# EAGLE board function_generator (EAGLE 6.1)
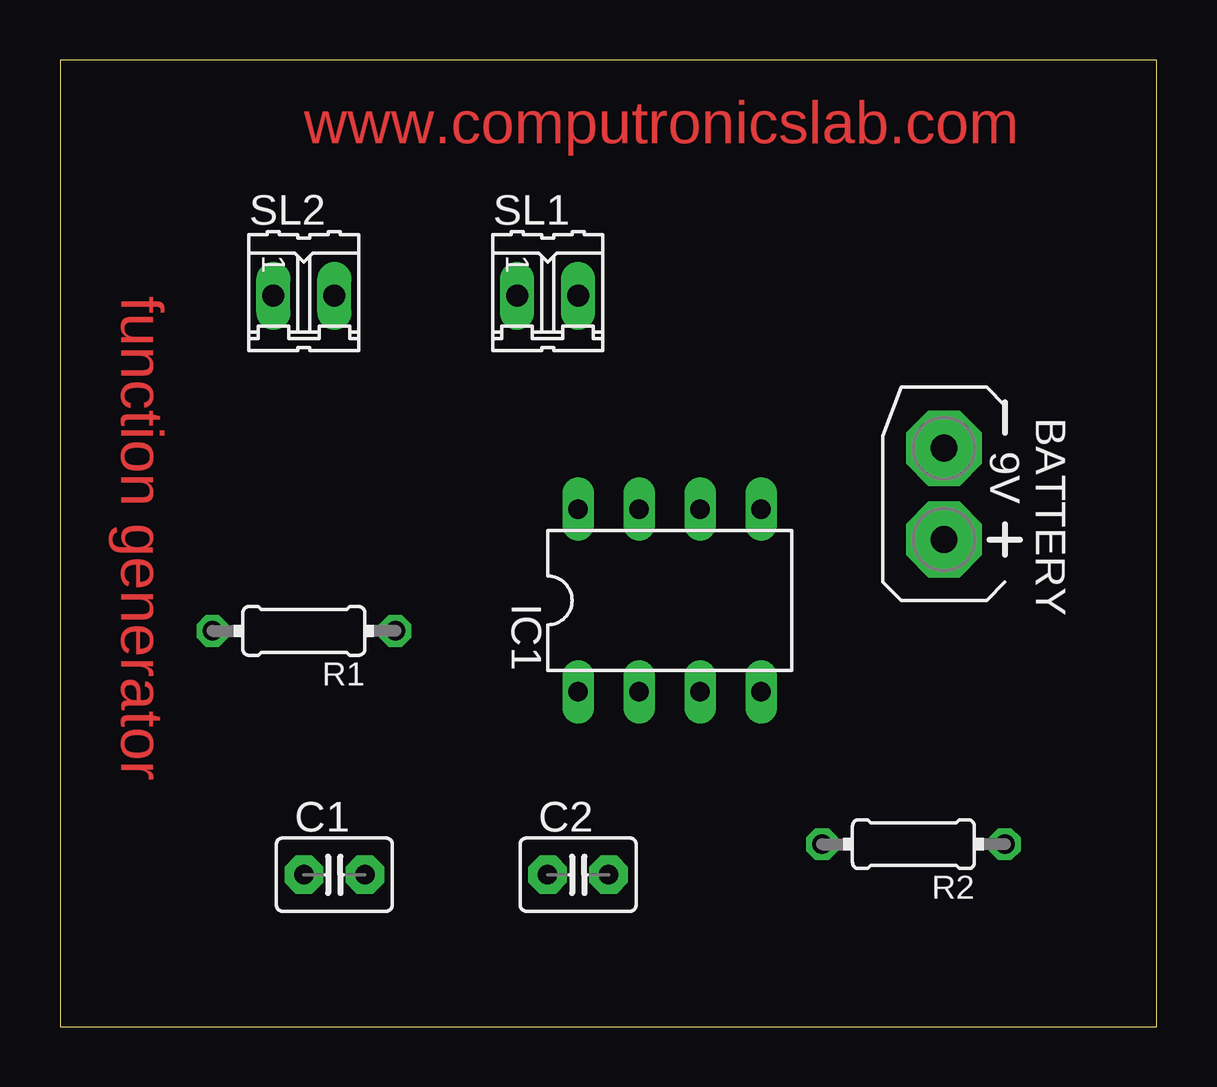
[diagram p0: board, top side]
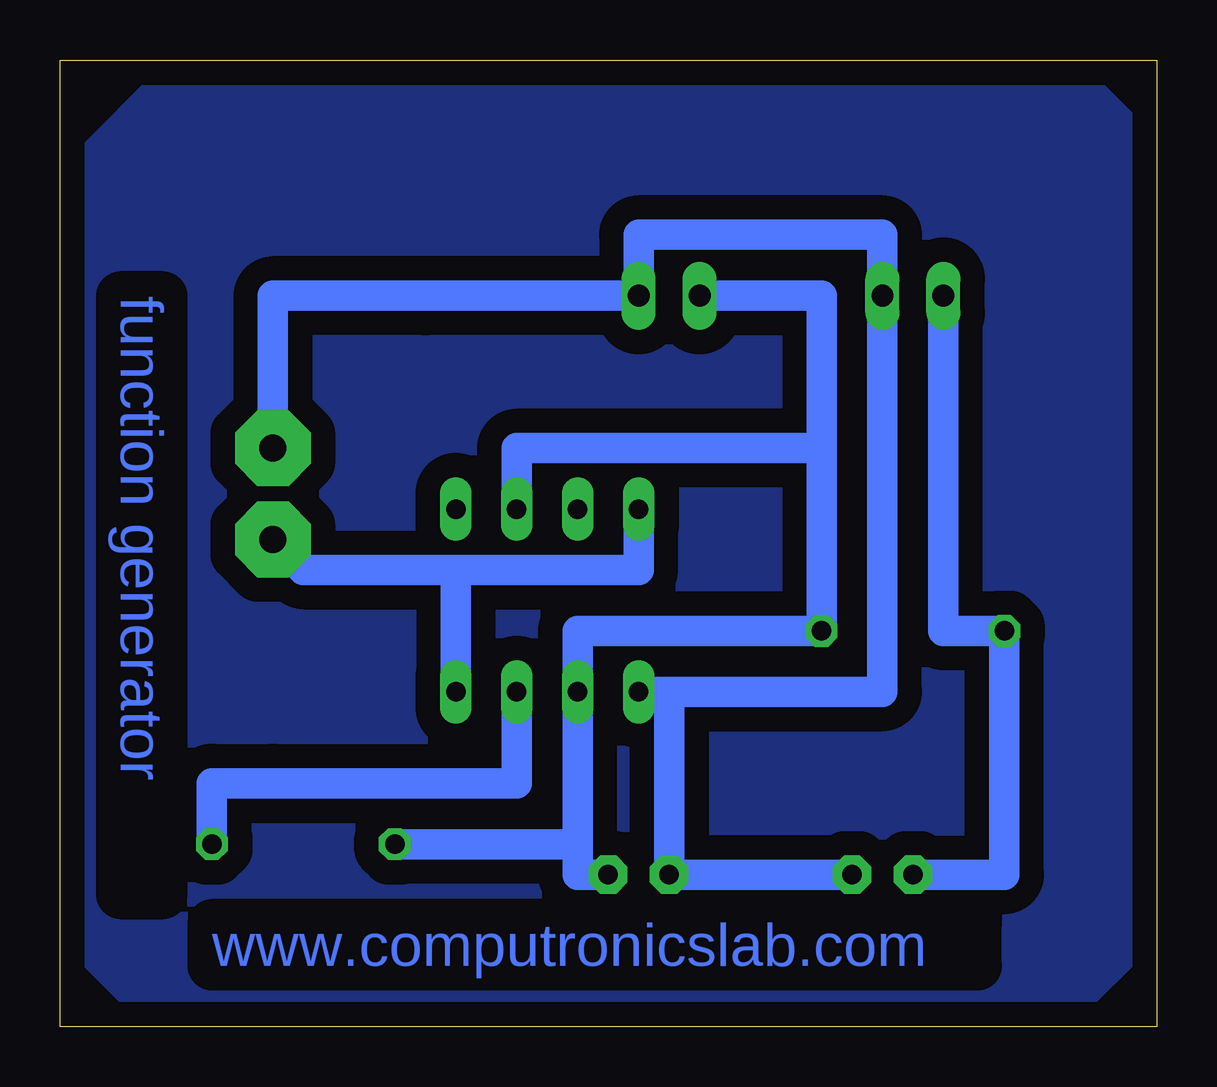
[diagram p1: board, bottom side, seen from below]

Size 45.7 x 40.31 mm. Coordinates in mm from the lower left corner, seen from the top.
Outline: 0,0 45.7,0 45.7,40.31 0,40.31 0,0
Copper layers (1*16): Top 0.035mm / dielectric 1.5mm / Bottom 0.035mm
Design rules: minimum track width 50mil, minimum drill 24mil, track to track 8mil, track to pad 8mil, pad to pad 8mil, via to via 8mil, smd to smd 8mil, copper to edge 40mil, drill to drill 8mil, minimum pad ring 10mil, minimum via ring 8mil, stop-mask expansion 4mil, vias tented up to drill 0mil, thermal gap 10mil

## Footprints (pad centres in the part's own frame; a part is rotated, then mirrored left to right if it is on the bottom)
AB9V = drill 1.118 pad 3.15 octagon: + 0,2.54; - 0,-1.27
C2.5-3 = drill 0.813 pad 1.6 octagon: 1 -1.27,0; 2 1.27,0
DIL-08 = drill 0.813 long: 1 -3.81,-3.81; 2 -1.27,-3.81; 3 1.27,-3.81; 4 3.81,-3.81; 5 3.81,3.81; 6 1.27,3.81; 7 -1.27,3.81; 8 -3.81,3.81
0204/7 = drill 0.813 octagon: 1 -3.81,0; 2 3.81,0
02P = drill 0.914 long: 1 -1.27,0; 2 1.27,0

## Placement (x,y rotation side)
BATTERY  9v  [AB9V]  36.83,22.86 180 top
C1  .2uf  [C2.5-3]  11.43,6.35 0 top
C2  .1uf  [C2.5-3]  21.59,6.35 0 top
IC1  NE555  [DIL-08]  25.4,17.78 0 top
R1  100K  [0204/7]  10.16,16.51 180 top
R2  47K  [0204/7]  35.56,7.62 180 top
SL1  square wave  [02P]  20.32,30.48 0 top
SL2  triangle wave  [02P]  10.16,30.48 0 top

## Library data of the parts
BATTERY = battery
C1 C2 = capacitor-wima
IC1 = st-microelectronics; MF: Arrow Electronics; MPN: NE555N; OC_FARNELL: 1467742; OC_NEWARK: 89K1486
R1 R2 = eagle-ltspice; SPICEMODEL: NONE; SPICEPREFIX: R
SL1 SL2 = con-amp-quick; OC_FARNELL: unknown; OC_NEWARK: unknown

## Nets
N$1: BATTERY.+ IC1.4 IC1.8
N$2: C2.2 IC1.2 IC1.6 R1.1 R2.2 SL1.1
N$4: BATTERY.- C1.2 C2.1 IC1.1 SL1.2 SL2.2
N$5: IC1.3 R2.1
N$6: C1.1 R1.2 SL2.1

## Tracks (layer width: path | path; a pad name or v marks a point on that pad's centre or on a via)
N$1
  Bottom 1.27: IC1.8 21.59,19.05 29.21,19.05 | 29.21,19.05 35.56,19.05 BATTERY.+ | 29.21,19.05 IC1.4
N$2
  Bottom 1.27: 24.13,7.62 24.13,6.35 C2.2 | 24.13,7.62 IC1.2 24.13,16.51 R1.1 13.97,24.13 | 24.13,7.62 R2.2 | 13.97,24.13 13.97,30.48 SL1.1 | IC1.6 26.67,24.13 13.97,24.13
N$3
  pour Bottom (isolate 1.016): 5.08,0 3.81,0 0,3.81 0,36.83 3.81,40.64 40.64,40.64 45.72,35.56 45.72,3.81 41.91,0
N$4
  Bottom 1.27: C2.1 13.97,6.35 C1.2 | C2.1 20.32,7.62 20.32,13.97 | 20.32,13.97 IC1.1 20.32,13.97 | 20.32,13.97 11.43,13.97 SL2.2 11.43,33.02 13.97,33.02 21.59,33.02 SL1.2 30.48,30.48 36.83,30.48 36.83,27.94 BATTERY.- | C2.1 20.32,8.89 20.32,13.97
N$5
  Bottom 1.27: IC1.3 26.67,10.16 36.83,10.16 39.37,10.16 R2.1
N$6
  Bottom 1.27: C1.1 6.35,6.35 R1.2 8.89,16.51 SL2.1

## Text on the board
Top: www.computronicslab.com | function generator
Bottom: function generator | www.computronicslab.com